# Altium PCB STM32_PCB.PcbDoc
Units mil, origin at the board's own origin, x right, y up, seen from the top; angles counter-clockwise.
Board outline 6000 x 4000 mil, 2 copper layers (Top Layer, Bottom Layer); 67 components, 74 nets, 247 pads, 0 vias.
Unrouted connection lines stored in the file: 141.
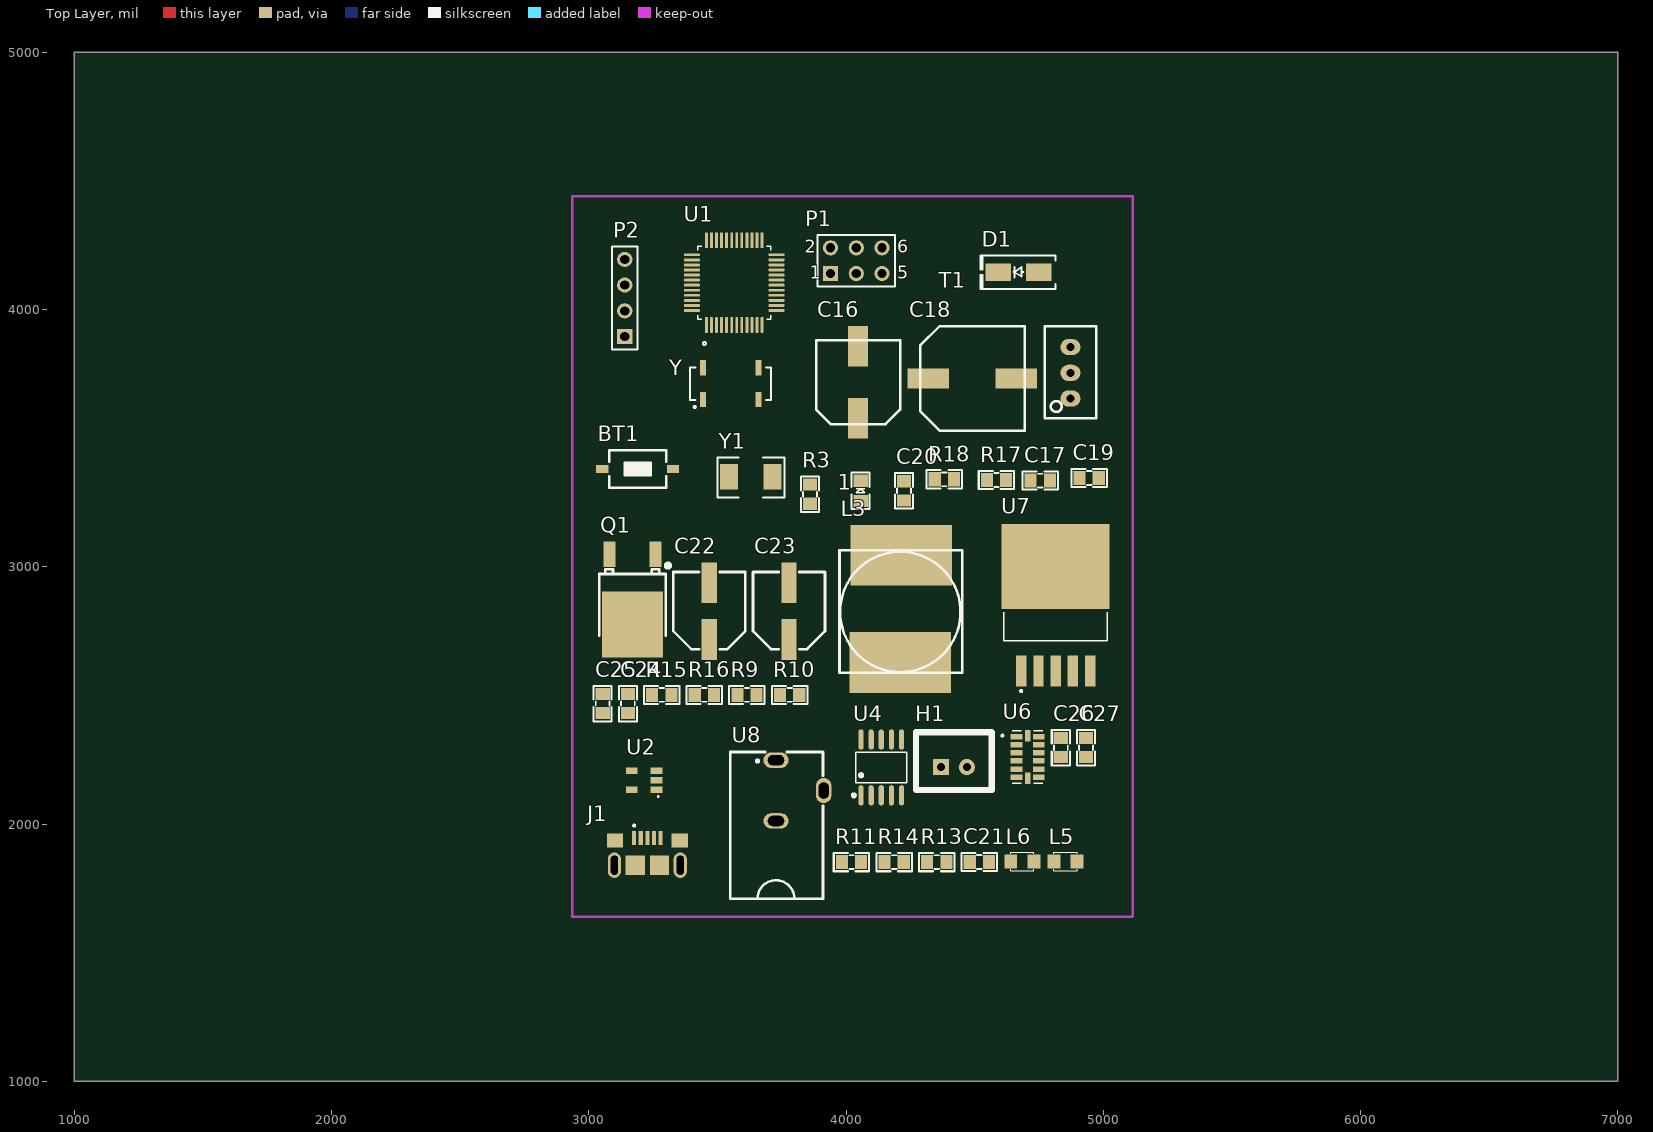
[diagram p0: Top Layer view]
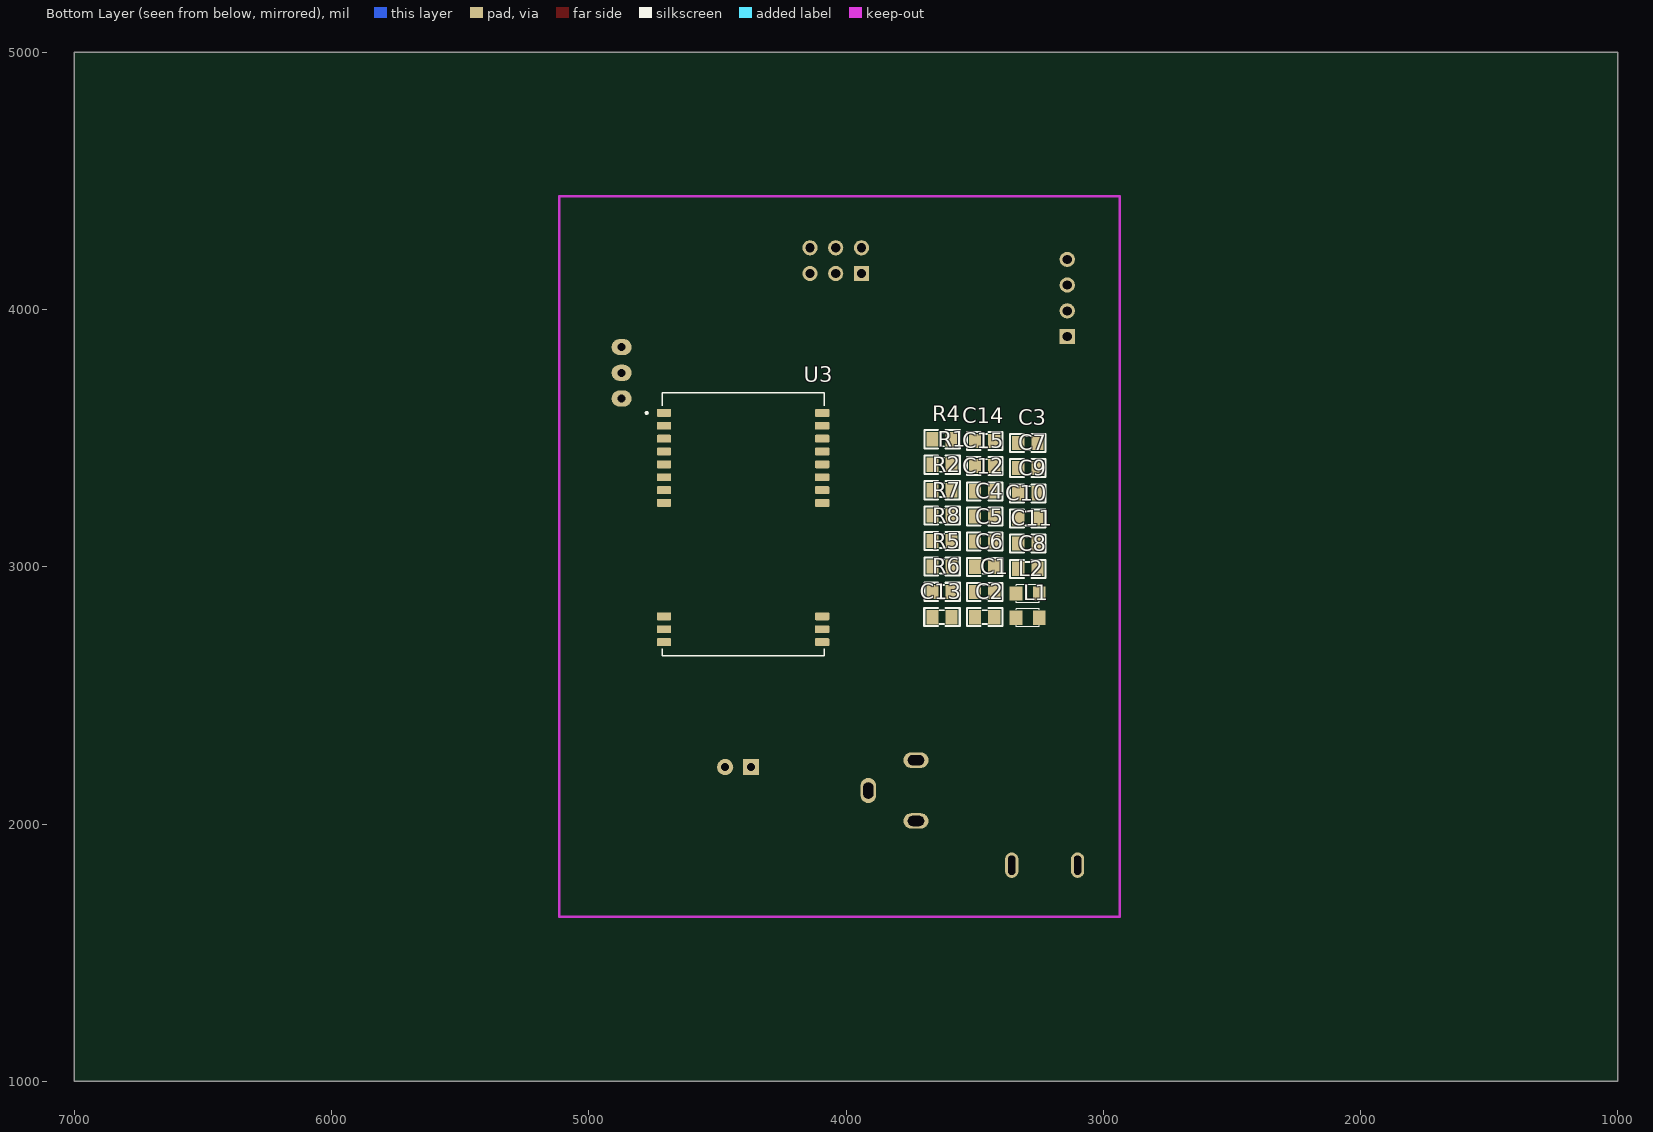
[diagram p1: Bottom Layer view, seen from below]

## Layer stack, top to bottom
Top Solder: solder mask 0.4, Solder Resist, Dk 3.5
Top Layer: signal copper 1.4
Dielectric 1: dielectric 12.6, FR-4, Dk 4.8
Bottom Layer: signal copper 1.4
Bottom Solder: solder mask 0.4, Solder Resist, Dk 3.5

## Board outline
1000,1000 7000,1000 7000,5000 1000,5000

## Design rules (kind name [scope] priority, off if disabled: settings)
Clearance [All] p1: gap=10 ignorepadtopadclearanceinfootprint=FALSE except(0: Arc-Hole Track-Hole SMDPad-Hole THPad-Hole Via-Hole Fill-Hole Poly-Hole Region-Hole Text-Hole)
PolygonConnect [All] p1: connectstyle=Relief reliefconductorwidth=10 reliefentries=4 polygonreliefangle="90 Angle" airgapwidth=10
RoutingVias [All] p1: holewidth=28 width=50 viastyle="Through Hole" minholewidth=28 minwidth=50 maxholewidth=28 maxwidth=50
SolderMaskExpansion [All] p1: expansion=4 istentingtop=FALSE
Width [All] p1: maxlimit=10 minlimit=10 preferedwidth=10
30 further rules are at their usual default settings.

## Classes and differential pairs
component class U_STM32_Schematic: BT1 C1 C2 C3 C4 C5 C6 C7 C8 C9 C10 C11 C12 C13 C14 C15 J1 L1 L2 P1 P2 R1 R2 R3 R4 R5 R6 R7 R8 U1 U2 Y Y1
component class U_POWER: 1 C16 C17 C18 C19 C20 D1 L3 R17 R18 T1 U7 U8
component class U_CN3791_solar: C21 C22 C23 C24 C25 C26 C27 D2 D3 H1 L4 L5 L6 P3 Q1 R9 R10 R11 R12 U4
component class U_ADXL345: R13 R14 R15 R16 U6

## Components (designator, comment, footprint, x,y, rotation, side; value= is the part's Value field where it differs from the comment)
1 "LED_0805" "led 0805" 4055,3295 r90 top
BT1 "Nut Nhan 2 Chan SMD 3x6x2.5" "Nut Nhan 2 Chan SMD 3x6x2.5" 3190,3380 r180 top
C1 "105" "Cap 0805" 3460.94,2901.81 r0 bottom
C2 "104" "Cap 0805" 3460.94,2803.94 r0 bottom
C3 "106" "Cap 0805" 3292.94,3481.31 r0 bottom
C4 "104" "Cap 0805" 3460.94,3195.43 r0 bottom
C5 "105" "Cap 0805" 3460.94,3097.56 r0 bottom
C6 "104" "Cap 0805" 3460.94,2999.68 r0 bottom
C7 "223" "Cap 0805" 3292.94,3383.43 r0 bottom
C8 "104" "Cap 0805" 3292.94,2991.94 r0 bottom
C9 "104" "Cap 0805" 3292.94,3285.56 r0 bottom
C10 "104" "Cap 0805" 3292.94,3187.68 r0 bottom
C11 "104" "Cap 0805" 3292.94,3089.81 r0 bottom
C12 "20pF" "Cap 0805" 3460.94,3293.31 r0 bottom
C13 "20pF" "Cap 0805" 3626.81,2803.94 r0 bottom
C14 "20pF" "Cap 0805" 3460.94,3489.05 r0 bottom
C15 "20pF" "Cap 0805" 3460.94,3391.18 r0 bottom
C16 "220uF" "tu nhom 8 (f)" 4046.97,3717.5 r90 top
C17 "0.1uF" "Tu 0805" 4755,3335 r0 top
C18 "1000uF" "tu nhom 10 (G)" 4491.32,3732.24 r0 top
C19 "0.1uF" "Tu 0805" 4945,3345 r0 top
C20 "0.0033uF" "tu 0805" 4225,3295 r90 top
C21 "100nF" "tu 0805" 4518.37,1852.28 r0 top
C22 "10uF" "Tu Nhom 10uF - 50V" 3468.47,2827.26 r0 top
C23 "10uF" "Tu Nhom 10uF - 50V" 3778.47,2827.26 r0 top
C24 "4.7uF" "Tu 0805" 3151.81,2468.28 r90 top
C25 "470nF" "tu 0805" 3053.94,2468.28 r90 top
C26 "4.7uF" "tu 0805" 4834.89,2297.06 r90 top
C27 "220nF" "tu 0805" 4932.76,2297.06 r90 top
D1 "SS34" "DIODE SMA" 4670,4145 r180 top
H1 "Header 2P 2.54 Duc Thang" XH2.54M-2 4369.77,2221.28 r0 top
J1 "2013499-1" TE_2013499-1 3227.76,1840 r0 top
L1 "LED 0805" LED-0805-Red 3249,2802 r0 bottom
L2 "LED 0805" LED-0805-Blue 3249,2896 r0 bottom
L3 "33uH" "Cuon Cam 100uH 3A" 3974.84,2588.31 r0 top
L5 "LED 0805" LED-0805-Green 4808.31,1854.21 r0 top
L6 "LED 0805" LED-0805-Red 4640.31,1854.21 r0 top
P1 "Header 3X2" HDR2X3 3940,4140 r0 top
P2 "ST-LINK" HDR1X4 3140,3895 r90 top
Q1 "TO-252" TO-252-3_L6.6-W6.1-P4.57-LS9.9-BR-CW 3175.37,2872.44 r90 top
R1 "100K" "tro smd 0805" 3626.71,3394.18 r0 bottom
R2 "100K" "tro smd 0805" 3626.71,3295.31 r0 bottom
R3 "10K" "tro smd 0805" 3862.39,3282.57 r270 top
R4 "20R" "tro smd 0805" 3626.71,3493.05 r0 bottom
R5 "20R" "tro smd 0805" 3626.71,2998.68 r0 bottom
R6 "510R" "tro smd 0805" 3626.71,2899.81 r0 bottom
R7 "510R" "tro smd 0805" 3626.71,3196.43 r0 bottom
R8 "510R" "tro smd 0805" 3626.71,3097.56 r0 bottom
R9 "0.1" "tro smd 0805" 3614.92,2504.28 r0 top
R10 "10K" "tro smd 0805" 3780.59,2504.28 r0 top
R11 "120" "tro smd 0805" 4021.26,1854.28 r0 top
R13 "4.7K" "tro smd 0805" 4352.6,1854.28 r0 top
R14 "4.7K" "tro smd 0805" 4186.93,1854.28 r0 top
R15 "4.7K" "tro smd 0805" 3283.58,2504.28 r0 top
R16 "4.7K" "tro smd 0805" 3449.25,2504.28 r0 top
R17 "1k" "tro smd 0805" 4585,3340 r0 top
R18 "510" "tro smd 0805" 4382.43,3342.39 r0 top
T1 "10K" "Bien Tro Vi Chinh Dung" 4872.29,3754 r90 top
U1 "STM32F103C8T6" QFP50P900X900X160-48N 3565.47,4104.57 r90 top
U2 "RT9193-33GB" SOT94P279X129-5N 3215,2170 r180 top
U3 "E32-433T20S" MODULE_E32-433T20S 4400,3165 r180 bottom
U4 "CN3791" SSOP-10_L4.9-W3.9-P1.00-LS6.0-BL -13777.88,19186.61 r0 top
U6 "ADXL345BCCZ" IC_ADXL345BCCZ 4706.2,2260.88 r0 top
U7 "LM2596DSADJG" CONV_LM2596DSADJG 4815,2850 r90 top
U8 "PJ-102BH" DC-IN-TH_PJ-102AH 3745,1995 r180 top
Y "MC-306_32.7680K-A5:_ROHS" OSCL550P800X320X254-4N 3551.73,3712.01 r90 top
Y1 "8Mhz" "Thach Anh 2 chan SMD5032" 3630,3350 r180 top value=4Mhz

## Footprints (in the part's own frame and the unit in brackets; to place one, negate y for a bottom-side part, rotate by r counter-clockwise, add the part's x,y. Pads: shape width x height; smd on the part's side, far side on the other; paste and mask are expansions set on the pad)
"Bien Tro Vi Chinh Dung" [mm] "Bien tro vi chinh"
  oval 1.6x2 hole 0.8: 1(-2.54,0) 2(0,0) 3(2.54,0)
  silkscreen extent -4.47,-2.54 4.6,2.54, body extent -4.54,-2.4 4.66,2.4, height 12.02
"Cap 0805" [mm] "Compoment SMD 80x50mil"
  rect 1.2x1.4 smd: 1(-0.946,-0.003) 2(0.954,-0.003)
  silkscreen extent -1.75,-0.89 1.75,0.89, body extent -0.97,-0.61 1.03,0.64, height 1.23
CONV_LM2596DSADJG [mm]
  rect 3.05x1.016 smd: 1(-6.485,3.404) 2(-6.485,1.702) 3(-6.485,0) 4(-6.485,-1.702) 5(-6.485,-3.404)
  rect 8.38x10.66 smd paste-6: 6(3.82,0)
  silkscreen extent -8.56,-5.12 -0.69,5.12, body extent -7.1,-5.07 7.1,5.07, height 4.57
"Cuon Cam 100uH 3A" [mm]
  rect 10x6 smd: 1(6.1,11.6) 2(6,1)
  silkscreen extent 0,0 12.1,12.1, body extent 0.1,-0.2 12.1,12.14, height 7.51
DC-IN-TH_PJ-102AH [mm]
  oval 2.5x1.524 hole 1 slot 1.6 at 0 deg paste+0 mask+0.051: 1(0.432,-6.429) 2(0.432,-0.429)
  oval 1.524x2.5 hole 1 slot 1.6 at 90 deg paste+0 mask+0.051: 3(-4.268,-3.429)
  silkscreen extent -4.2,-7.24 4.94,7.24
"DIODE SMA" [mm] "SMA"
  rect 2.5x1.7 smd: 1(-2,0) 2(2,0)
  silkscreen extent -3.68,-1.65 3.75,1.65, body extent -2.6,-1.37 2.6,1.37, height 2.4
HDR1X4 [mm] "Connector; Header; 4 Position"
  rect 1.5x1.5 hole 0.9: 1(0,0)
  round 1.5 hole 0.9: 2(2.54,0) 3(5.08,0) 4(7.62,0)
  silkscreen extent -1.27,-1.27 8.89,1.27
HDR2X3 [mm] "Connector; Header; 3x2 Position"
  rect 1.5x1.5 hole 0.9: 1(0,0)
  round 1.5 hole 0.9: 2(0,2.54) 3(2.54,0) 4(2.54,2.54) 5(5.08,0) 6(5.08,2.54)
  silkscreen extent -1.27,-1.27 6.35,3.81
IC_ADXL345BCCZ [mm]
  rect 1.145x0.55 smd: 1(-1.098,2) 2(-1.098,1.2) 3(-1.098,0.4) 4(-1.098,-0.4) 5(-1.098,-1.2) 6(-1.098,-2) 8(1.098,-2) 9(1.098,-1.2) 10(1.098,-0.4) 11(1.098,0.4) 12(1.098,1.2) 13(1.098,2)
  rect 0.55x1.145 smd: 7(0,-2.097) 14(0,2.097)
  silkscreen extent -2.6,-2.6 1.5,2.6, body extent -1.5,-2.5 1.5,2.5, height 1
"led 0805" [mm]
  rect 1.2x1.4 smd: 1(-0.996,-0.051) 2(1.004,-0.051)
  silkscreen extent -1.78,-0.94 1.8,0.84, body extent -0.98,-0.65 1.04,0.6, height 1.1
LED-0805-Blue [mil]
  rect 50x55 smd: 1(0,0) 2(90,0)
  silkscreen extent 0,-35 90,35, body extent 5,-25 85,25, height 43
LED-0805-Green [mil]
  rect 50x55 smd: 1(0,0) 2(90,0)
  silkscreen extent 0,-35 90,35, body extent 5,-25 85,25, height 43
LED-0805-Red [mil]
  rect 50x55 smd: 1(0,0) 2(90,0)
  silkscreen extent 0,-35 90,35, body extent 5,-25 85,25, height 43
MODULE_E32-433T20S [mm]
  rrect25% 1.41x0.77 smd: 1(-7.81,11) 2(-7.81,9.73) 3(-7.81,8.46) 4(-7.81,7.19) 5(-7.81,5.92) 6(-7.81,4.65) 7(-7.81,3.38) 8(-7.81,2.11) 11(-7.81,-9.09) 12(-7.81,-10.36) 13(-7.81,-11.63) 14(7.81,-11.63) 15(7.81,-10.36) 16(7.81,-9.09) 19(7.81,2.11) 20(7.81,3.38) 21(7.81,4.65) 22(7.81,5.92) 23(7.81,7.19) 24(7.81,8.46) 25(7.81,9.73) 26(7.81,11)
  silkscreen extent -9.61,-13 8,13, body extent -8,-13 8,13, height 3.25
"Nut Nhan 2 Chan SMD 3x6x2.5" [mm] "Switch SMD type"
  rect 1.2x0.8 smd: 1(-3.5,0) 2(3.5,0)
  silkscreen extent -2.82,-1.85 2.82,1.85, body extent -3.05,-1.85 3.05,1.85, height 2.5
OSCL550P800X320X254-4N [mm]
  rect 1.5x0.6 smd: 1(-1.575,2.75) 2(-1.575,-2.75) 3(1.575,-2.75) 4(1.575,2.75)
  silkscreen extent -2.4,-4 1.6,4
QFP50P900X900X160-48N [mm]
  rrect50% 1.56x0.28 smd: 1(-4.18,2.75) 2(-4.18,2.25) 3(-4.18,1.75) 4(-4.18,1.25) 5(-4.18,0.75) 6(-4.18,0.25) 7(-4.18,-0.25) 8(-4.18,-0.75) 9(-4.18,-1.25) 10(-4.18,-1.75) 11(-4.18,-2.25) 12(-4.18,-2.75) 25(4.18,-2.75) 26(4.18,-2.25) 27(4.18,-1.75) 28(4.18,-1.25) 29(4.18,-0.75) 30(4.18,-0.25) 31(4.18,0.25) 32(4.18,0.75) 33(4.18,1.25) 34(4.18,1.75) 35(4.18,2.25) 36(4.18,2.75)
  rrect50% 0.28x1.56 smd: 13(-2.75,-4.18) 14(-2.25,-4.18) 15(-1.75,-4.18) 16(-1.25,-4.18) 17(-0.75,-4.18) 18(-0.25,-4.18) 19(0.25,-4.18) 20(0.75,-4.18) 21(1.25,-4.18) 22(1.75,-4.18) 23(2.25,-4.18) 24(2.75,-4.18) 37(2.75,4.18) 38(2.25,4.18) 39(1.75,4.18) 40(1.25,4.18) 41(0.75,4.18) 42(0.25,4.18) 43(-0.25,4.18) 44(-0.75,4.18) 45(-1.25,4.18) 46(-1.75,4.18) 47(-2.25,4.18) 48(-2.75,4.18)
  silkscreen extent -6.15,-3.6 3.6,3.6, body extent -4.5,-4.5 4.5,4.5, height 1.6
SOT94P279X129-5N [mm]
  rrect12% 1.17x0.67 smd: 1(-1.22,0.94) 2(-1.22,0) 3(-1.22,-0.94) 4(1.22,-0.94) 5(1.22,0.94)
  silkscreen extent -1.47,1.53 -1.33,1.67, body extent -1.4,-1.45 1.4,1.45, height 1.3
SSOP-10_L4.9-W3.9-P1.00-LS6.0-BL [mm]
  oval 0.525x2.014 smd paste+0 mask+0.051: 1(453.042,-433.713) 2(454.042,-433.713) 3(455.042,-433.713) 4(456.042,-433.713) 5(457.042,-433.713) 6(457.042,-428.199) 7(456.042,-428.199) 8(455.042,-428.199) 9(454.042,-428.199) 10(453.042,-428.199)
  silkscreen extent 452.18,-433.86 457.57,-429.43
TE_2013499-1 [mm]
  rect 0.4x1.35 smd: 1(-1.3,2.675) 2(-0.65,2.675) 3(0,2.675) 4(0.65,2.675) 5(1.3,2.675)
  rect 1.6x1.4 smd: SH1(-3.2,2.45) SH4(3.2,2.45)
  rect 1.9x1.9 smd: SH2(-1.2,0) SH3(1.2,0)
  oval 1.31x2.5 hole 0.71 slot 1.9 at 90 deg: SH5(3.255,0) SH6(-3.255,0)
  silkscreen extent -1.4,3.8 -1.2,4, body extent -4,-2.49 4,3.11, height 2.76
"Thach Anh 2 chan SMD5032" [mil] "DO-214-AA/SMB; 2 C-Bend Leads; Body 5.3 x 3.6 mm, inc. leads (LxW)"
  rect 70x100 smd: 1(-85,0) 2(85,0)
  silkscreen extent -130,-75 130,80, body extent -98,-63 98,63, height 51
TO-252-3_L6.6-W6.1-P4.57-LS9.9-BR-CW [mm]
  rect 2.5x1.2 smd: 1(4.475,-2.149) 3(4.475,2.423)
  rect 6.5x6 smd: 2(-2.475,0.137)
  silkscreen extent -3.57,-3.56 3.55,3.44, body extent -4.23,-3.29 5.47,3.29, height 2.32
"tro smd 0805" [mm]
  rect 1.2x1.4 smd: 1(-0.946,-0.061) 2(0.954,-0.061)
  silkscreen extent -1.75,-0.97 1.75,0.84, body extent -1.56,-0.76 1.44,0.64, height 0.53
"Tu 0805" [mm] "Compoment SMD 80x50mil"
  rect 1.2x1.4 smd: 1(-0.946,-0.003) 2(0.954,-0.003)
  silkscreen extent -1.75,-0.89 1.75,0.89, body extent -1.01,-0.64 1.01,0.63, height 0.61
"tu 0805" [mm] "Compoment SMD 80x50mil"
  rect 1.2x1.4 smd: 1(-0.946,-0.003) 2(0.954,-0.003)
  silkscreen extent -1.75,-0.89 1.75,0.89, body extent -1.01,-0.64 1.01,0.63, height 0.61
"tu nhom 8 (f)" [mm]
  rect 4x2 smd: 1(-3.55,0) 2(3.55,0)
  silkscreen extent -4.15,-4.15 4.15,4.15, body extent -4.85,-4.25 4.85,4.25, height 10.5
"tu nhom 10 (G)" [mm]
  rect 4.1x2 smd: 1(-4.35,0) 2(4.35,0)
  silkscreen extent -5.15,-5.15 5.15,5.15, body extent -5.9,-5.25 5.9,5.25, height 10.5
"Tu Nhom 10uF - 50V" [mm]
  rect 1.5x4 smd: 1(0,-2.794) 2(0,2.794)
  silkscreen extent -3.56,-3.75 3.56,3.87, body extent -3.3,-3.59 3.3,3.71, height 6.15
XH2.54M-2 [mm]
  rect 1.6x1.6 hole 0.8: 1(0,0)
  round 1.6 hole 0.8: 2(2.54,0)
  silkscreen extent -2.48,-2.26 5.02,3.46, body extent -2.48,-2.26 5.02,3.48, height 6.91

## Part data
1: "Dán"
C1 C2 C3 C4 C5 C6 C7 C8 C9 C10 C11 C12 C13 C14 C15: library part "Cap 0805", "Capacitor SMD 0805"
C16: library part "Tu Nhom 220uF 25V", "Dán", Chung_Loai=Dán, Don_Vi=Con, Ma_Hang=MH002221, So_Chan=2, Ten_Linh_Kien="Tụ Nhôm 220uF 25V"
C17: library part "Tu 104", "Dán", Chung_Loai=Dán, Don_Vi=Con, Ma_Hang=MH004551, Ten_Linh_Kien="Tụ 0805 104-100nF 10% 50V"
C18: library part "Tu Nhom 1000uF 10V", "Dán", Chung_Loai=Dán, Don_Vi=Con, Ma_Hang=MH007515, So_Chan=2, Ten_Linh_Kien="Tụ Nhôm 1000uF 10V"
C19: library part "Tu 105", "Dán", Chung_Loai=Dán, Don_Vi=Con, Ma_Hang=MH004552, Ten_Linh_Kien="Tụ 0805 105-1uF 10% 50V"
C20: library part "Tu 0805 221 50V", "Dán", Chung_Loai=Dán, Don_Vi=Con, Ma_Hang=MH007365, So_Chan=2, Ten_Linh_Kien="Tụ 0805 221-220P 50V"
C21 C25 C26 C27: library part "Tu 0805 33nF 50V 20%", "Dán", Chung_Loai=Dán, Don_Vi=Con, Ma_Hang=MH007854, So_Chan=2, Ten_Linh_Kien="Tụ 0805 33nF 50V 20%"
C22 C23: JLCPCB Part Class="Extended Part", Manufacturer=ROQANG, Manufacturer Part=RVT1V100M0505, Package Display=No, nameAlias=Capacitance, spicePre=C, spiceSymbolName=RVT1V100M0505, Supplier=LCSC, Supplier Part=C72486
C24: JLCPCB Part Class="Extended Part", Manufacturer=TDK, Manufacturer Part=C1608X5R1V475KT000E, Package Display=No, Contributor=LCSC, nameAlias=Capacitance, spicePre=C, spiceSymbolName=C1608X5R1V475KT000E, Supplier=LCSC, Supplier Part=C329940
D1: library part "Diode SS34 ( 1N5822 )", "Dán", Chung_Loai=Dán, Don_Vi=Con, Ma_Hang=MH002104, Ten_Linh_Kien="Diode SS34 3A 40V SMA ( 1N5822 SS34A)"
H1: "Cắm", Chung_Loai=Cắm, Don_Vi=Con, Ma_Hang=MH001283, Ten_Linh_Kien="Header 2P XH2.54-2P Đực Thẳng"
J1: Package=None, Availability=Unavailable, MP=2013499-1, Price=None
L1 L6: library part "LED 0805 Do", "Dán", Chung_Loai=Dán, Don_Vi=Con, Ma_Hang=MH000897, Ten_Linh_Kien="LED 0805 Màu Đỏ (Red)"
L2: library part "LED 0805 Xanh Duong", "Dán", Chung_Loai=Dán, Don_Vi=Con, Ma_Hang=MH002327, Ten_Linh_Kien="LED 0805 Màu Xanh Dương (Blue)"
L3: library part "CUON CAM 47uH_ SMD", "Dán", Chung_Loai=Dán, Don_Vi=Con, Ma_Hang=MH004211, Ten_Linh_Kien="Cuộn Cảm 47uH 7x7x4MM CD74R"
L5: library part "LED 0805 Xanh La", "Dán", Chung_Loai=Dán, Don_Vi=Con, Ma_Hang=MH002326, Ten_Linh_Kien="LED 0805 Màu Xanh Lá (Green)"
P1: "Header, 3-Pin, Dual row", LatestRevisionDate=17-Jul-2002, LatestRevisionNote="Re-released for DXP Platform.", Publisher="Altium Limited"
P2: library part "Header 4", "Header, 4-Pin", LatestRevisionDate=17-Jul-2002, LatestRevisionNote="Re-released for DXP Platform.", Publisher="Altium Limited"
Q1: library part "FET AO D409", "P-Channel Power MOSFET", ComponentLink1Description="Manufacturer Link", ComponentLink1URL=http://www.irf.com/, ComponentLink2Description=Datasheet, ComponentLink2URL=http://www.irf.com/product-info/datasheets/data/irf9540.pdf, DatasheetVersion=PD-9.421C, LatestRevisionDate=17-Jul-2002, LatestRevisionNote="Re-released for DXP Platform.", Note="Pin 2 is electrically connected to pin 4.", PackageDescription="TO, Thru-Hole, Vertical, Heatsink Mounted; 3 In-Line Leads; Pitch 2.54 mm", PackageReference=TO-220AB, PackageVersion=Feb-1997, Published=8-Jun-2000, Publisher="Altium Limited"
R1 R2 R3 R4 R5 R6 R7 R8 R13 R14 R15 R16: library part "Tro 0805 1% 0.5R", "Dán", Chung_Loai=Dán, Don_Vi=Con, Ma_Hang=MH005465, So_Chan=2, Ten_Linh_Kien="Trở 0805 1% 0.5R"
R9 R10 R11 R17 R18: library part "Tro 0805 1% 1k", "Dán", Chung_Loai=Dán, Don_Vi=Con, Ma_Hang=MH005468, So_Chan=2, Ten_Linh_Kien="Trở 0805 1% 1k"
T1: library part "Bien Tro Tinh Chinh 10K Dung", "Cắm", Chung_Loai=Cắm, Don_Vi=Con, Ma_Hang=MH003232, Ten_Linh_Kien="Biến Trở VR 103-10K 3296W"
U1: "ARM® Cortex®-M3 STM32F1 Microcontroller IC 32-Bit 72MHz 64KB (64K x 8) FLASH 48-LQFP (7x7)", Package="LQFP-48 STMicroelectronics", Check_prices=https://www.snapeda.com/parts/STM32F103C8T6/STMicroelectronics/view-part/?ref=eda, MF=STMicroelectronics, MP=STM32F103C8T6, SnapEDA_Link=https://www.snapeda.com/parts/STM32F103C8T6/STMicroelectronics/view-part/?ref=snap
U2: "Linear Voltage Regulator IC Positive Fixed 1 Output 300mA TSOT-23-5", Package="SOT-23-5 Richtek", Check_prices=https://www.snapeda.com/parts/RT9193-33GB/Richtek+USA+Inc./view-part/?ref=eda, Digi-Key_Part_Number=1028-1014-2-ND, MF="Richtek USA", MP=RT9193-33GB, Purchase-URL=https://pricing.snapeda.com/search/part/RT9193-33GB/?ref=eda, SnapEDA_Link=https://www.snapeda.com/parts/RT9193-33GB/Richtek+USA+Inc./view-part/?ref=snap
U3: "Wireless serial port module (UART)", Package=Package, Availability="Not in stock", Check_prices=https://www.snapeda.com/parts/E32-433T20S/EBYTE/view-part/?ref=eda, MF=EBYTE, MP=E32-433T20S, Price=None, SnapEDA_Link=https://www.snapeda.com/parts/E32-433T20S/EBYTE/view-part/?ref=snap
U6: "3-Axis, Â±2 g/Â±4 g/Â±8 g/Â±16 g Digital Accelerometer", Package="LGA -14 Analog Devices", Check_prices=https://www.snapeda.com/parts/ADXL345BCCZ/Analog+Devices/view-part/?ref=eda, MF="Analog Devices", MP=ADXL345BCCZ, SnapEDA_Link=https://www.snapeda.com/parts/ADXL345BCCZ/Analog+Devices/view-part/?ref=snap
U7: "LM2596DSADJG Switching Regulator 3A Adjustable, 1.23 to 37 V, 5-Pin D2PAK", Package="D2PAK-5 ON Semiconductor", Check_prices=https://www.snapeda.com/parts/LM2596DSADJG/Onsemi/view-part/?ref=eda, MF="ON Semiconductor", MP=LM2596DSADJG, SnapEDA_Link=https://www.snapeda.com/parts/LM2596DSADJG/Onsemi/view-part/?ref=snap
Y: "32.768kHz Â±100ppm Crystal 12.5pF 50 kOhms 4-SOJ, 5.50mm pitch", Package="4-4 Epson", Availability=Unavailable, MF=EPSON, MP="MC-306 32.7680K-A5: ROHS", Price=None, SnapEDA_Link=https://www.snapeda.com/parts/MC-306%2032.7680K-A5%3A%20ROHS/EPSON/view-part/620500/?ref=snap
Y1: library part "Thach Anh 2 chan SMD 5032", "Crystal For all Crystal 2pin."
BT1: Ma_Hang=MH001036, Ten="Nút Nhấn 2 Chân 3x6x2.5MM SMD"

## Nets (pads, with @x,y where several pads share a name; then routed paths per layer and width w, separated by ;. In a path a pad name is that pad's centre, name@x,y a point inside that pad or via, vN(x,y) a via of type N, cw(c..) or ccw(c..) an arc to the next point about the centre after c; other vN are vias at no path point)
5V: J1.1
+5: C5.2 C6.2 U2.1 U2.3
BOOT0: R1.2 U1.44
BOOT1: R2.1
GND: BT1.1 C1.1 C2.1 C3.1 C4.1 C5.1 C6.1 C7.1 C8.1 C9.1 C10.1 C11.1 C13.2 C15.2 J1.4 J1.5 J1.SH1 J1.SH2 J1.SH3 J1.SH4 J1.SH5 J1.SH6 P1.5 P1.6 P2.1 R6.2 R15.2 U1.8 U1.23 U1.35 U1.47 U2.2 U3.2 U3.8 U3.11 U3.13 U3.14 U3.15 U3.16 U3.19 U3.20 U3.21 U3.26 U6.2 U6.4 U6.5
Net1_1: 1.1 R17.1
NetC7_2: C7.2 U2.4
NetC12_2: C12.2 C14.2
NetC18_1: C18.1 C19.2 C22.1 C26.1 R9.1 U4.7 U7.1 U8.1
NetC20_2: C20.2 R18.2 T1.3
NetC21_1: C21.1 C23.1 C24.2 C25.2 H1.2 Q1.3 R10.2 U4.9
NetC21_2: C21.2 U4.1
NetC27_1: C27.1 R11.1
NetD1_2: D1.2 L3.1 U7.2
NetD2_1: 
NetD2_2: Q1.2
NetJ1_2: J1.2 R4.1
NetJ1_3: J1.3 R5.1
NetL1_2: L1.2 R6.1
NetL2_2: L2.2 R8.1
NetL4_2: R9.2 U4.8
NetL5_1: L5.1 L6.1 R10.1
NetL5_2: L5.2 U4.4
NetL6_2: L6.2 U4.3
NetP1_3: P1.3 R1.1
NetP1_4: P1.4 R2.2
NetP3_1: U4.6
NetQ1_1: Q1.1 U4.10
NetR11_2: R11.2 U4.5
NetR13_2: R13.2 U6.7
NetR15_1: R15.1 U6.12
NetT1_2: T1.2 U7.4
NetU3_24: U3.24
NetU6_8: U6.8
NetU6_9: U6.9
OSCIN: C12.1 R7.2 U1.5 Y1.1
OSCOUT: C14.1 R7.1 U1.6 Y1.2
PA0: U1.10
PA1: U1.11
PA2: U1.12
PA3: U1.13
PA4: U1.14
PA5: U1.15
PA6: U1.16
PA7: U1.17
PA8: U1.29
PA9: U1.30 U3.22
PA10: U1.31 U3.23
PA11: R4.2 U1.32
PA12: R5.2 U1.33
PA15: U1.38
PB0: U1.18
PB1: U1.19
PB2: U1.20
PB3: U1.39
PB4: U1.40
PB5: U1.41
PB6: U1.42
PB7: U1.43
PB8: R14.1 U1.45 U6.14
PB9: R16.1 U1.46 U6.13
PB10: U1.21
PB11: U1.22
PB12: U1.25
PB13: U1.26
PB14: U1.27
PC13: R8.2 U1.2
PC14: C13.1 U1.3 Y.1
PC15: C15.1 U1.4 Y.4
RESET: BT1.2 C1.2 R3.1 U1.7
SWCLK: P2.2 U1.37
SWDIO: P2.3 U1.34
VBAT: U1.1
VCC3V3: C2.2 C3.2 C4.2 C8.2 C9.2 C10.2 C11.2 C16.1 C17.2 C20.1 L1.1 L2.1 L3.2 P1.1 P1.2 P2.4 R3.2 R13.1 R14.2 R16.2 R17.2 T1.1 U1.9 U1.24 U1.36 U1.48 U2.5 U3.25 U6.1 U6.6
pads on no net: 1.2 C16.2 C17.1 C18.2 C19.1 C22.2 C23.2 C24.1 C25.1 C26.2 C27.2 D1.1 H1.1 R18.1 U1.28 U3.1 U3.3 U3.4 U3.5 U3.6 U3.7 U3.12 U4.2 U6.3 U6.10 U6.11 U7.3 U7.5 U7.6 U8.2 U8.3 Y.2 Y.3

## Keep-outs
Keep-Out Layer:
  lines w10: 2935,1640 5115,1640 5115,4380 5115,4440 2935,4440 2935,1735 2935,1640

## Text inside footprints (layer, text, board x,y; h text height)
J1: Mechanical 13 "PCB EDGE" at 3402.95,1794.72 h50
P1: Top Overlay "6" at 4200,4220 h50; Top Overlay "5" at 4200,4120 h50; Top Overlay "2" at 3840,4220 h50; Top Overlay "1" at 3860,4120 h50